# EAGLE board JD-T1800 Display Breakout (EAGLE 9.2.2)
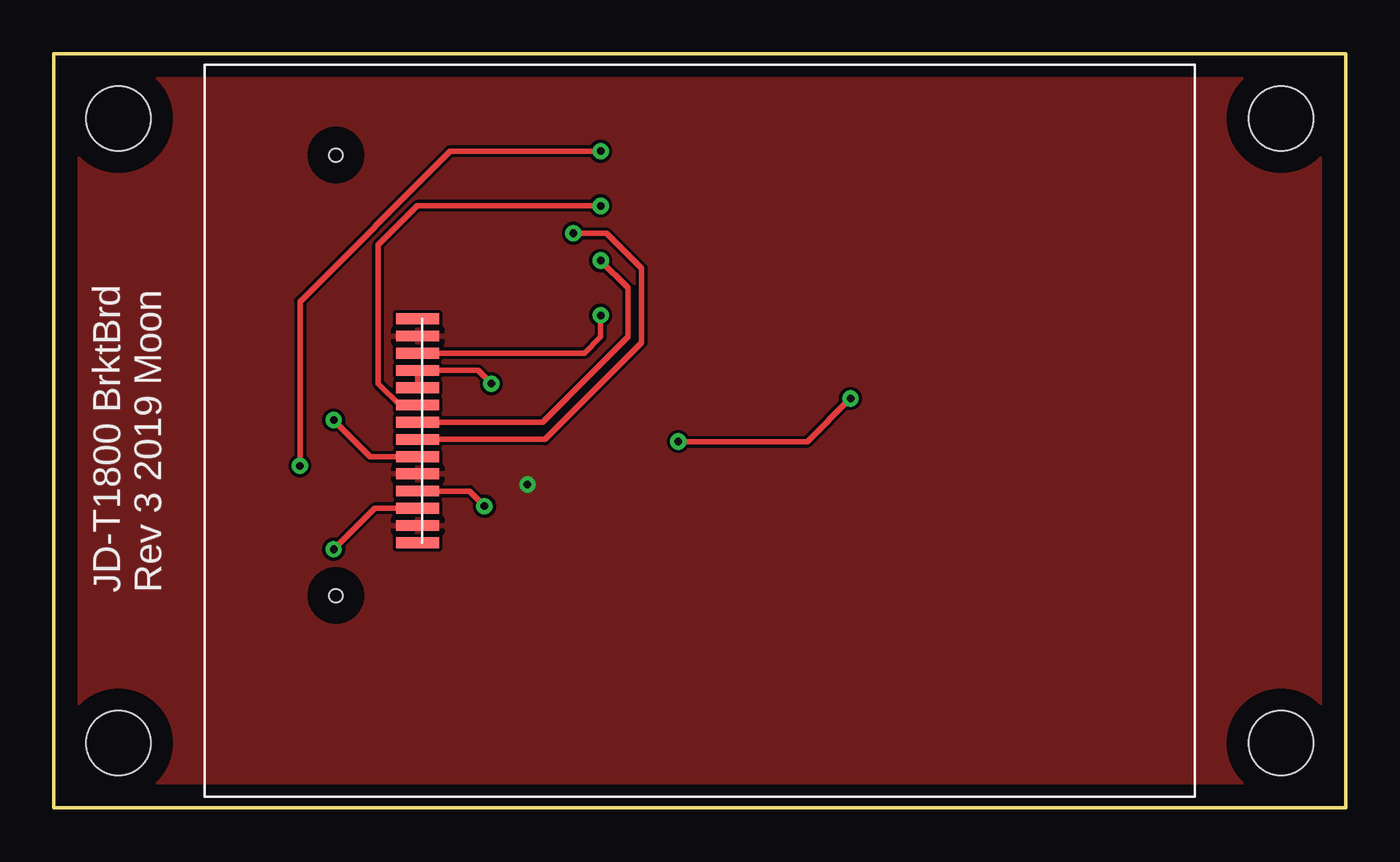
[diagram p0: board, top side]
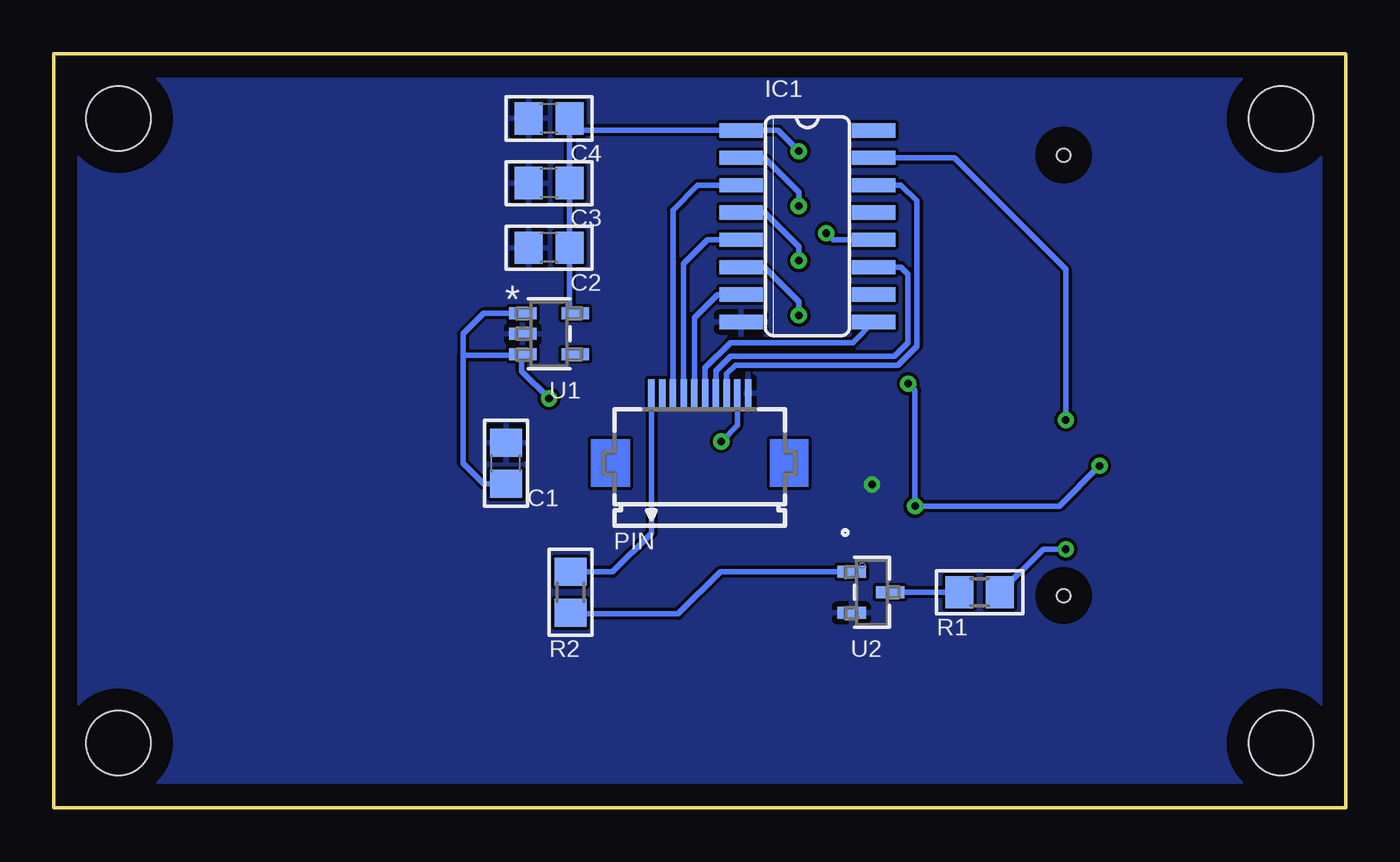
[diagram p1: board, bottom side, seen from below]

Size 60 x 35 mm. Coordinates in mm from the lower left corner, seen from the top.
Outline: 0,35 0,0 60,0 60,35 0,35
Copper layers (1*16): Top 0.035mm / dielectric 1.5mm / Bottom 0.035mm
Design rules "default *": minimum track width 6mil, minimum drill 10mil, track to track 6mil, track to pad 6mil, pad to pad 6mil, via to via 6mil, smd to smd 6mil, copper to edge 40mil, drill to drill 6mil, minimum pad ring 10mil, minimum via ring 8mil, stop-mask expansion 4mil, vias tented up to drill 0mil, thermal gap 10mil
Holes 3 mm at 3,32 3,3 57,3 57,32

## Footprints (pad centres in the part's own frame; a part is rotated, then mirrored left to right if it is on the bottom)
C0805 = smd 1.3 x 1.5: 1 -0.95,0; 2 0.95,0
SO16 = smd 0.66 x 2.032: 1 -4.445,-3.073; 2 -3.175,-3.073; 3 -1.905,-3.073; 4 -0.635,-3.073; 5 0.635,-3.073; 6 1.905,-3.073; 7 3.175,-3.073; 8 4.445,-3.073; 9 4.445,3.073; 10 3.175,3.073; 11 1.905,3.073; 12 0.635,3.073; 13 -0.635,3.073; 14 -1.905,3.073; 15 -3.175,3.073; 16 -4.445,3.073
FH12-10S-0.5SH = smd 0.3 x 1.3: 1 -2.25,3.25; 2 -1.75,3.25; 3 -1.25,3.25; 4 -0.75,3.25; 5 -0.25,3.25; 6 0.25,3.25; 7 0.75,3.25; 8 1.25,3.25; 9 1.75,3.25; 10 2.25,3.25
R0805 = smd 1.3 x 1.5: 1 -0.95,0; 2 0.95,0
MF05A = smd 1.27 x 0.559: 1 -1.219,0.953; 2 -1.219,0; 3 -1.219,-0.953; 4 1.219,-0.953; 5 1.219,0.953
SOT23 = smd 0.559 x 1.321: 1 -0.953,-0.945; 2 0.953,-0.945; 3 0,0.847
JD-T1800 = smd 0.5 x 2: 1 5.2,-13.1; 2 4.4,-13.1; 3 3.6,-13.1; 4 2.8,-13.1; 5 2,-13.1; 6 1.2,-13.1; 7 0.4,-13.1; 8 -0.4,-13.1; 9 -1.2,-13.1; 10 -2,-13.1; 11 -2.8,-13.1; 12 -3.6,-13.1; 13 -4.4,-13.1; 14 -5.2,-13.1 | hole 0.6: -12.8,-16.9; 7.65,-16.9

## Placement (x,y rotation side)
C1  10  [C0805]  39,16 90 bottom
C2  10  [C0805]  37,26 180 bottom
C3  0.1  [C0805]  37,29 180 bottom
C4  0.1  [C0805]  37,32 180 bottom
IC1  4050D  [SO16]  25,27 270 bottom
PIN  FH12-10S-0.5SH  [FH12-10S-0.5SH]  30,16 0 bottom
R1  22  [R0805]  17,10 180 bottom
R2  1K  [R0805]  36,10 90 bottom
U1  LP2981AIM5-3.3/NOPB  [MF05A]  37,22 0 bottom
U2  MMBT2222A  [SOT23]  22,10 270 bottom
U$1  JD-T1800  [JD-T1800]  30,17.5 270 top

## Library data of the parts
C1-C4 = rcl; SPICEPREFIX: C
IC1 = 40xx
PIN = con-hirose; MPN: FH12-10S-0.5SH(55); OC_FARNELL: 1324540; OC_NEWARK: 34M6152
R1 R2 = resistor
U1 = LP2981AIM5-3.3; MANUFACTURER_PART_NUMBER: LP2981AIM53.3NOPB; VENDOR: Texas Instruments
U2 = MMBT2222A; MANUFACTURER_PART_NUMBER: MMBT2222A; VENDOR: Nexperia
U$1 = adafruit

## Nets
5CARDCS: IC1.9 PIN.6
5CLK: IC1.3 PIN.3
5CS: IC1.7 PIN.5
5MOSI: IC1.5 PIN.4
5RESET: IC1.14 PIN.8
5RS/DC: IC1.11 PIN.7
+3V3: C2.1 C3.1 C4.1 IC1.1 U1.5 U$1.4 U$1.10 U$1.11
+5V: C1.1 PIN.9 U1.1 U1.3
CARDCS: IC1.10
CLK: IC1.2 U$1.9
CS: IC1.6 U$1.12
GND: C1.2 C2.2 C3.2 C4.2 IC1.8 PIN.10 U1.2 U2.2 U$1.2 U$1.5 U$1.13
LEDK: PIN.1 R2.2
MISO: PIN.2
MOSI: IC1.4 U$1.8
N$1: R1.1 U$1.3
N$2: R1.2 U2.3
N$3: R2.1 U2.1
RESET: IC1.15 U$1.6
RS/DC: IC1.12 U$1.7

## Tracks (layer width: path | path; a pad name or v marks a point on that pad's centre or on a via)
5CARDCS
  Bottom 0.254: PIN.6 29.75,20.41 28.57,21.59 22.89,21.59 IC1.9
5CLK
  Bottom 0.254: PIN.3 31.25,27.75 30.09,28.91 IC1.3
5CS
  Bottom 0.254: PIN.5 30.25,22.75 29.18,23.82 IC1.7
5MOSI
  Bottom 0.254: PIN.4 30.75,25.25 29.64,26.36 IC1.5
5RESET
  Bottom 0.254: PIN.8 28.75,20.14 28.35,20.55 20.79,20.55 19.91,21.42 19.91,28.17 20.65,28.91 IC1.14
5RS/DC
  Bottom 0.254: PIN.7 29.25,20.28 28.57,20.95 20.95,20.95 20.32,21.59 20.32,24.77 20.65,25.09 IC1.11
+3V3  (via drill 0.35)
  Top 0.254: U$1.4 19.3,14.7 v20,14 | v20.32,19.68 19.7,20.3 U$1.11 U$1.10 | v25.4,30.48 18.41,30.48 11.43,23.5 v11.43,15.88
  Bottom 0.254: U1.5 36.05,23.22 C2.1 C3.1 C4.1 35.49,31.45 IC1.1 26.36,31.45 v25.4,30.48 | v20.32,19.68 20,19.36 v20,14 13.3,14 v11.43,15.88
+5V  (via drill 0.35)
  Top 0.254: v29,17 35,17 v37,19
  Bottom 0.254: C1.1 40.05,15.05 41,16 41,21 | U1.1 40.05,22.95 41,22 41,21 | U1.3 38.27,21 | 41,21 38.27,21 | PIN.9 28.25,17.75 v29,17 | v37,19 38.27,20.27 38.27,21
CLK  (via drill 0.35)
  Top 0.254: v25.4,27.94 16.88,27.94 15.06,26.13 15.06,19.68 16.05,18.7 U$1.9
  Bottom 0.254: IC1.2 27,30.18 25.4,28.57 v25.4,27.94
CS  (via drill 0.35)
  Top 0.254: v25.4,22.86 25.4,21.86 24.64,21.1 U$1.12
  Bottom 0.254: IC1.6 27,25.09 25.4,23.5 v25.4,22.86
GND  (via drill 0.35)
  other vias: 22,15
  pour Top: -1,36 -1,-1 61,-1 61,36
  pour Bottom: -2,37 -2,-2 62,-2 62,37
LEDK
  Bottom 0.254: PIN.1 32.25,12.75 34.05,10.95 R2.2
MOSI  (via drill 0.35)
  Top 0.254: v25.4,25.4 26.67,24.13 26.67,21.86 22.71,17.9 U$1.8
  Bottom 0.254: IC1.4 27,27.64 25.4,26.04 v25.4,25.4
N$1  (via drill 0.35)
  Top 0.254: U$1.3 14.9,13.9 v13,12
  Bottom 0.254: R1.1 14.05,12 v13,12
N$2
  Bottom 0.254: R1.2 U2.3
N$3
  Bottom 0.254: U2.1 29.05,10.95 31,9 35.95,9 R2.1
RESET  (via drill 0.35)
  Top 0.254: v13,18 14.7,16.3 U$1.6
  Bottom 0.254: IC1.15 18.18,30.18 13,25 v13,18
RS/DC  (via drill 0.35)
  Top 0.254: v24.13,26.67 25.67,26.67 27.3,25.04 27.3,21.59 22.82,17.1 U$1.7
  Bottom 0.254: IC1.12 23.82,26.36 v24.13,26.67

## Text on the board
tPlace: JD-T1800 BrktBrd / Rev 3 2019 Moon